# Altium PCB PCB.PcbDoc
Units mm, origin at the board's own origin, x right, y up, seen from the top; angles counter-clockwise.
Board outline 63.5 x 29 mm, 2 copper layers (Top Layer, Bottom Layer); 8 components, 8 nets, 31 pads, 0 vias.
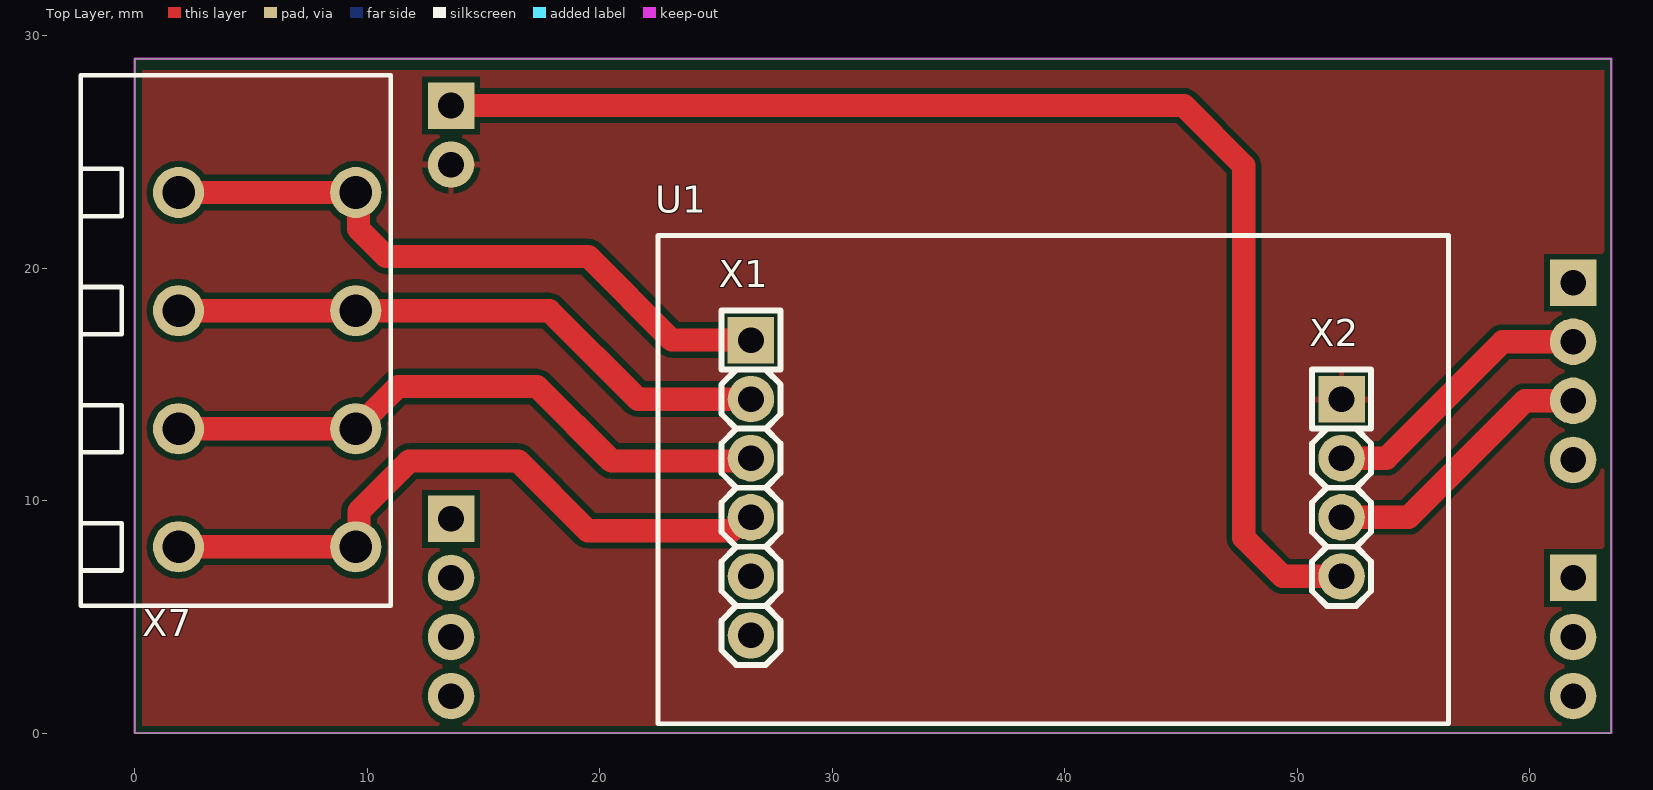
[diagram p0: Top Layer view]
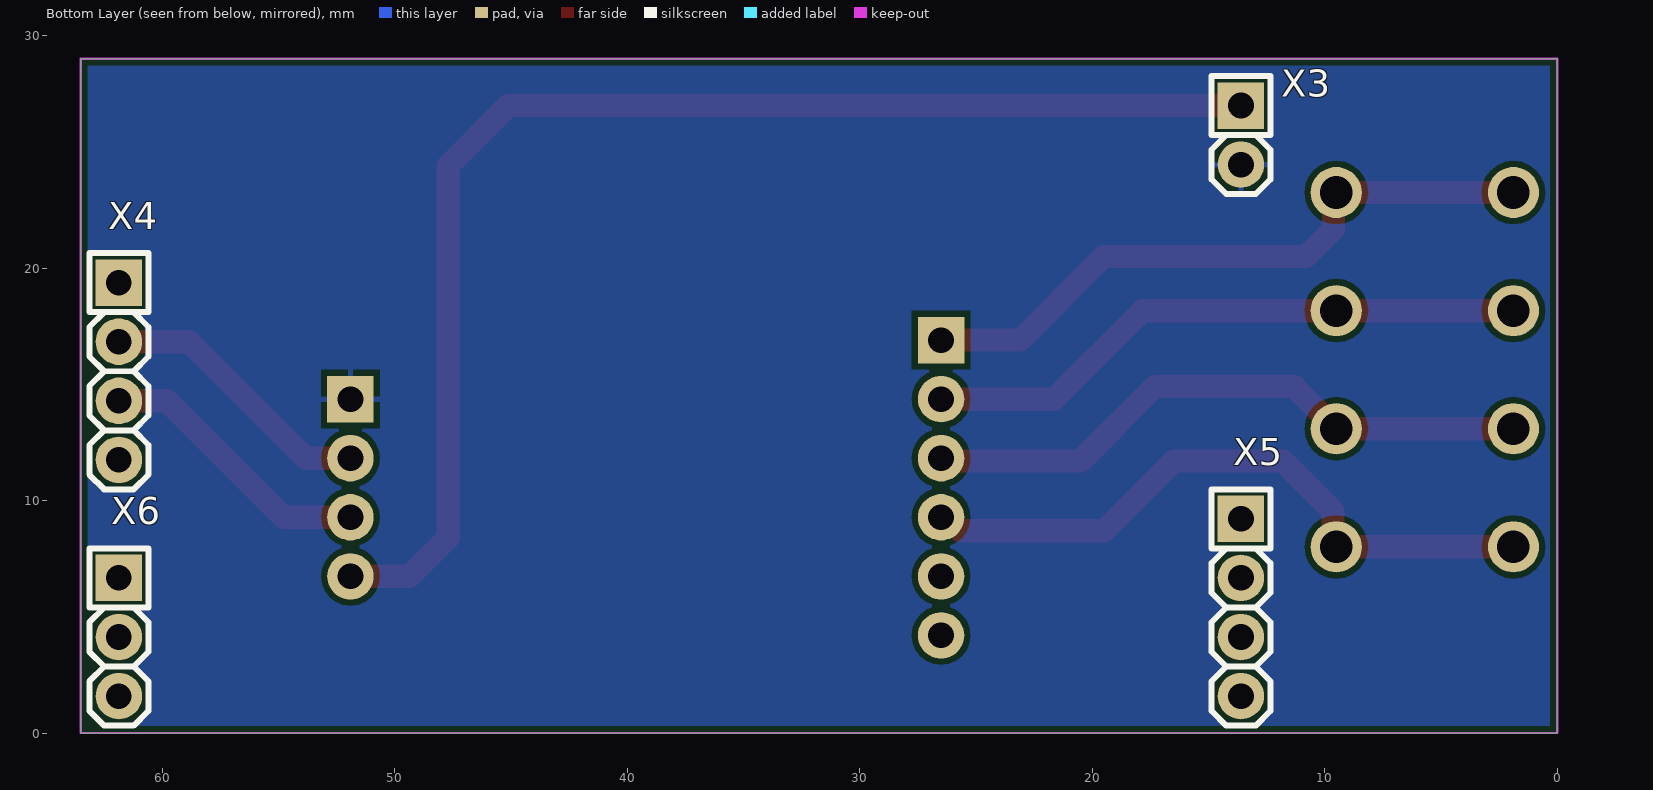
[diagram p1: Bottom Layer view, seen from below]
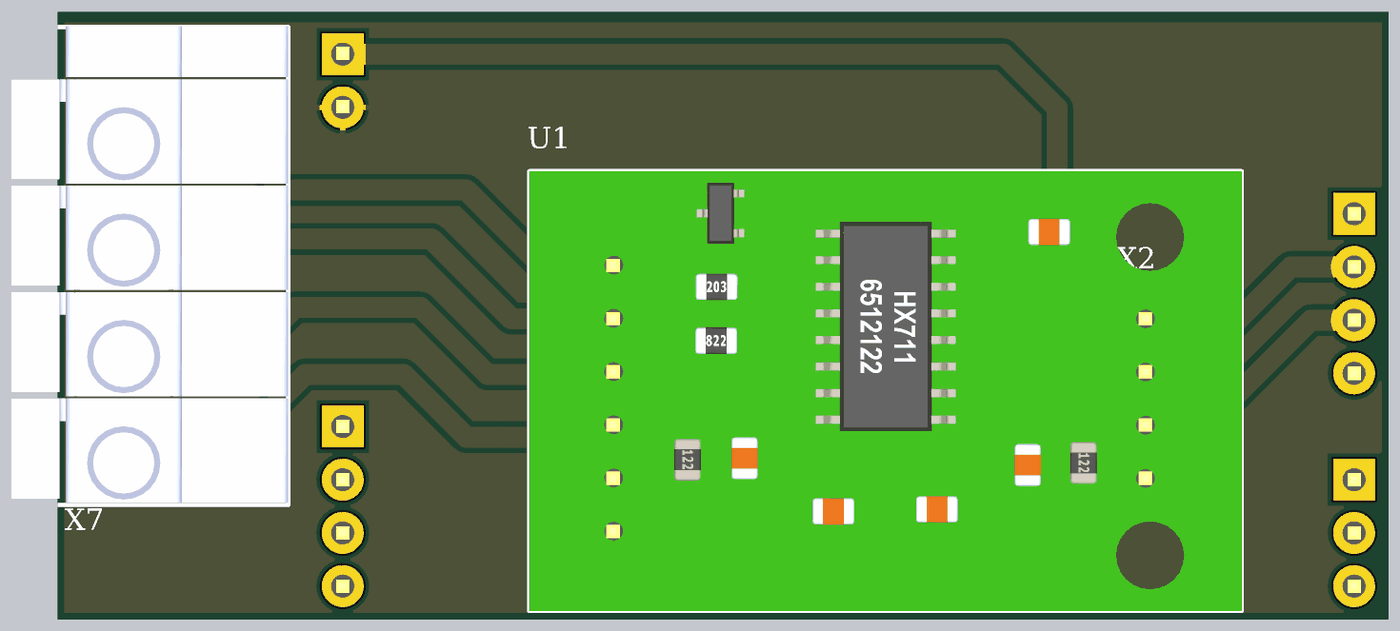
[diagram p2: 3D render of the assembled board from above, using the file's embedded part models]
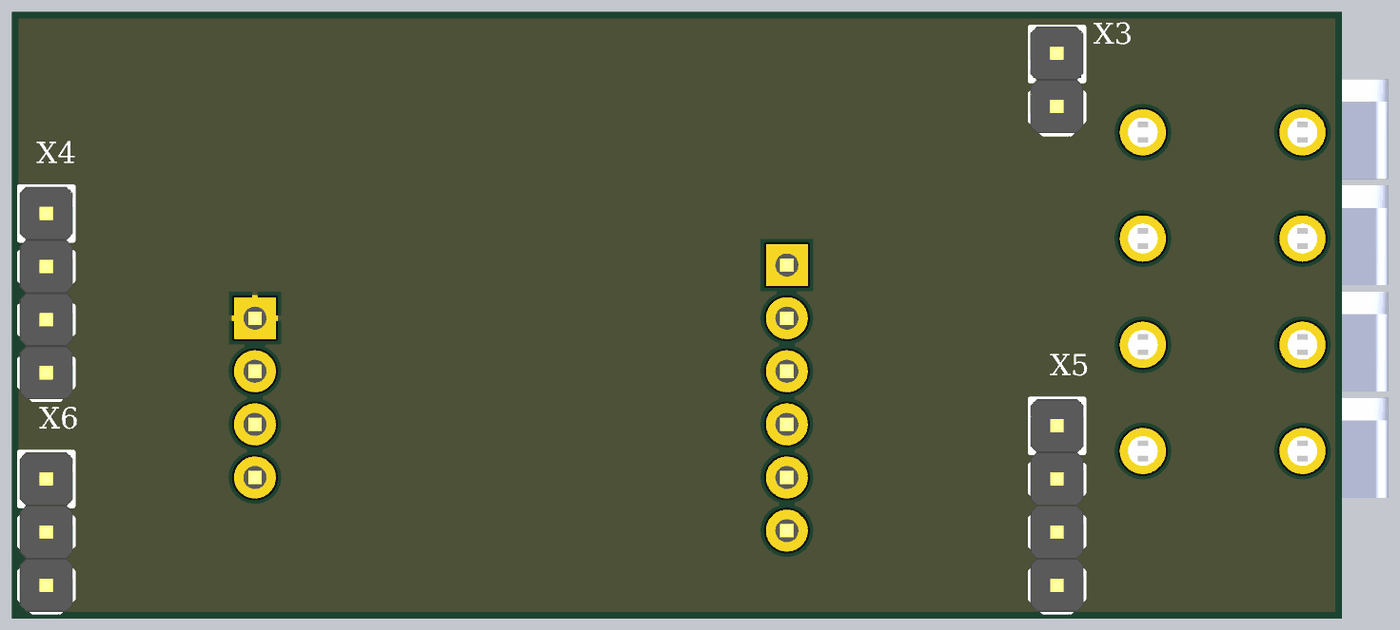
[diagram p3: 3D render of the assembled board from below, using the file's embedded part models]

## Layer stack, top to bottom
Top Solder: solder mask 0.0102, Solder Resist, Dk 3.5
Top Layer: signal copper 0.0356
Dielectric 1: dielectric 0.32, FR-4, Dk 4.8
Bottom Layer: signal copper 0.0356
Bottom Solder: solder mask 0.0102, Solder Resist, Dk 3.5

## Board outline
0,0 0,29 63.5,29 63.5,0

## Design rules (kind name [scope] priority, off if disabled: settings)
Clearance [All] p1: gap=0.254 ignorepadtopadclearanceinfootprint=FALSE except(0: Arc-Hole Track-Hole SMDPad-Hole THPad-Hole Via-Hole Fill-Hole Poly-Hole Region-Hole Text-Hole)
ComponentClearance ComponentClearance_U1_X2 [InComponent('U1') vs InComponent('X2')] p1: gap=0 collisioncheckmode=3 verticalgap=0 showdistances=FALSE
ComponentClearance ComponentClearance_U1_X1 [InComponent('X1') vs InComponent('U1')] p2: gap=0 collisioncheckmode=3 verticalgap=0 showdistances=FALSE
ComponentClearance [All] p3: gap=0.254 collisioncheckmode=3 verticalgap=0.254 showdistances=FALSE
PolygonConnect [All] p1: connectstyle=Relief reliefconductorwidth=0.254 reliefentries=4 polygonreliefangle="90 Angle" airgapwidth=0.254
RoutingVias [All] p1: holewidth=0.711 width=1.27 viastyle="Through Hole" minholewidth=0.711 minwidth=1.27 maxholewidth=0.711 maxwidth=1.27
SolderMaskExpansion [All] p1: expansion=0.102 istentingtop=FALSE
Width [All] p1: maxlimit=10 minlimit=0.15 preferedwidth=0.3
29 further rules are at their usual default settings.

## Components (designator, comment, footprint, x,y, rotation, side; value= is the part's Value field where it differs from the comment)
U1 "HX711" HX711 26.5,16.9 r0 top
X1 "PLS-6 (DS1021-1x6)" "CON: PLS-6" 26.5,10.55 r270 top
X2 "PLS-4 (DS-1021-1x4)" "CON: PLS-4" 51.9,10.55 r270 top
X3 "PLS-2 (DS1021-1x2)" "CON: PLS-2" 13.6,25.72 r270 bottom
X4 "PLS-4 (DS-1021-1x4)" "CON: PLS-4" 61.86,15.56 r270 bottom
X5 "PLS-4 (DS-1021-1x4)" "CON: PLS-4" 13.6,5.4 r270 bottom
X6 "PLS-3 (DS1021-1x3)" "CON: PLS-3" 61.86,4.13 r270 bottom
X7 "DG142R-5.08-04P-14-00AH" "CON: DG142V-5.08-4P" 9.5,23.247 r270 top

## Footprints (in the part's own frame and the unit in brackets; to place one, negate y for a bottom-side part, rotate by r counter-clockwise, add the part's x,y. Pads: shape width x height; smd on the part's side, far side on the other; paste and mask are expansions set on the pad)
"CON: DG142V-5.08-4P" [mm] "4 Position Terminal Block Vertical 5.08mm Through Hole"
  round 2.2 hole 1.4: 1(0,0) 1(0,-7.62) 2(5.08,0) 2(5.08,-7.62) 3(10.16,0) 3(10.16,-7.62) 4(15.24,-7.62) 4(15.24,0)
  silkscreen extent -5.04,-11.83 17.78,1.5, body extent -5.08,-11.7 17.68,1.5, height 14.1
"CON: PLS-2" [mm]
  rect 2x2 hole 1.1: 1(-1.27,0)
  round 2 hole 1.1: 2(1.27,0)
  silkscreen extent -2.54,-1.27 2.54,1.27, body extent -2.57,-1.28 2.51,1.26, height 8.54
"CON: PLS-3" [mm]
  rect 2x2 hole 1.1: 1(-2.54,0)
  round 2 hole 1.1: 2(0,0) 3(2.54,0)
  silkscreen extent -3.81,-1.27 3.81,1.27, body extent -3.81,-1.27 3.81,1.27, height 8.54
"CON: PLS-4" [mm] "PLS-40 4 pin header"
  rect 2x2 hole 1.1: 1(-3.81,0)
  round 2 hole 1.1: 2(-1.27,0) 3(1.27,0) 4(3.81,0)
  silkscreen extent -5.08,-1.27 5.08,1.27, body extent -5.08,-1.27 5.08,1.27, height 8.54
"CON: PLS-6" [mm]
  rect 2x2 hole 1.1: 1(-6.35,0)
  round 2 hole 1.1: 2(-3.81,0) 3(-1.27,0) 4(1.27,0) 5(3.81,0) 6(6.35,0)
  silkscreen extent -7.62,-1.27 7.62,1.27, body extent -7.62,-1.27 7.62,1.27, height 8.54
HX711 [mm] "ADC module"
  silkscreen extent -4,-16.5 30,4.5, body extent -4,-16.5 30,4.5, height 4.47

## Part data
U1: "ADC Module", Manufacturer=OKYSTAR, Manufacturer Part Number=8002691862, ComponentKind=TH, ComponentLink1Description=HeplURL, ComponentLink1URL=https://www.chipdip.ru/product0/8002691862, HeplURL=https://www.chipdip.ru/product0/8002691862
X1: library part 6-Connector, Manufacturer="Connfly electronic (Zhenqin)", ComponentKind=TH, HelpURL=https://www.chipdip.ru/product/pls-6, Model="PLS-6 (DS1021-1x6)"
X2 X4 X5: library part 4-Connector, Manufacturer="Connfly electronic (Zhenqin)", ComponentKind=TH, HelpURL=https://www.chipdip.ru/product/pls-4, Model="PLS-4 (DS-1021-1x4)"
X3: library part 2-Connector, Manufacturer="Connfly electronic (Zhenqin)", ComponentKind=TH, HelpURL=https://www.chipdip.ru/product/pls-2, Model="PLS-2 (DS1021-1x2)"
X6: library part 3-Connector, Manufacturer="Connfly electronic (Zhenqin)", ComponentKind=TH, HelpURL=https://www.chipdip.ru/product/pls-3, Model="PLS-3 (DS1021-1x3)"
X7: library part 4-Connector, Manufacturer="Degson Electronics", ComponentKind=TH, HelpURL=https://www.chipdip.ru/product0/8001774654, Model=DG142R-5.08-04P-14-00AH

## Nets (pads, with @x,y where several pads share a name; then routed paths per layer and width w, separated by ;. In a path a pad name is that pad's centre, name@x,y a point inside that pad or via, vN(x,y) a via of type N, cw(c..) or ccw(c..) an arc to the next point about the centre after c; other vN are vias at no path point)
DT: X2.2 X4.2 | length 12
  Top Layer w1: X2.2 53.82,11.82 58.83,16.83 X4.2
GND: X2.1 X3.2
IN_A+: X1.4 X7.4 | length 28.4
  Top Layer w1: X7.4@1.88,8.007 9.5,8.007 9.642,8.149 9.642,9.542 11.8,11.7 16.489,11.7 19.489,8.701 25.65,8.701 26.229,9.28 X1.4
IN_A-: X1.3 X7.3 | length 26.7
  Top Layer w1: X7.3@1.88,13.087 9.5,13.087 11.313,14.9 17.3,14.9 20.5,11.7 26.38,11.7 X1.3
SCK: X2.3 X4.3 | length 12
  Top Layer w1: X2.3 54.78,9.28 59.79,14.29 X4.3
VCC: X2.4 X3.1 | length 56.1
  Top Layer w1: X3.1 45.11,26.99 47.7,24.4 47.7,8.4 49.36,6.74 X2.4
VCC_SENS+: X1.1 X7.1 | length 28.1
  Top Layer w1: X7.1@1.88,23.247 9.5,23.247 9.615,23.132 9.615,21.685 10.8,20.5 19.5,20.5 23.1,16.9 X1.1
VCC_SENS-: X1.2 X7.2 | length 26.2
  Top Layer w1: X7.2@1.88,18.167 9.5,18.167 17.833,18.167 21.64,14.36 X1.2
pads on no net: X1.5 X1.6 X4.1 X4.4 X5.1 X5.2 X5.3 X5.4 X6.1 X6.2 X6.3

## Polygon pours and split planes (outlines as drawn)
GND on Top Layer "GND" (solid, pour order 0): 0,28.5 0,0 63.5,0 63.5,28.5
GND on Bottom Layer "GND" (solid, remove dead copper, pour order 1): 0,29 0,0 63.5,0 63.5,29

## Keep-outs
Keep-Out Layer:
  the board outline again, w0.1

## Silkscreen, mask and mechanical layers (free items; w line width, h text height)
Area:
  the board outline again, w0.2